# Altium PCB PCB_Project.PcbDoc
Units mil, origin at the board's own origin, x right, y up, seen from the top; angles counter-clockwise.
Board outline 1574.8 x 1574.8 mil, 2 copper layers (Top Layer, Bottom Layer); 30 components, 25 nets, 151 pads, 12 vias.
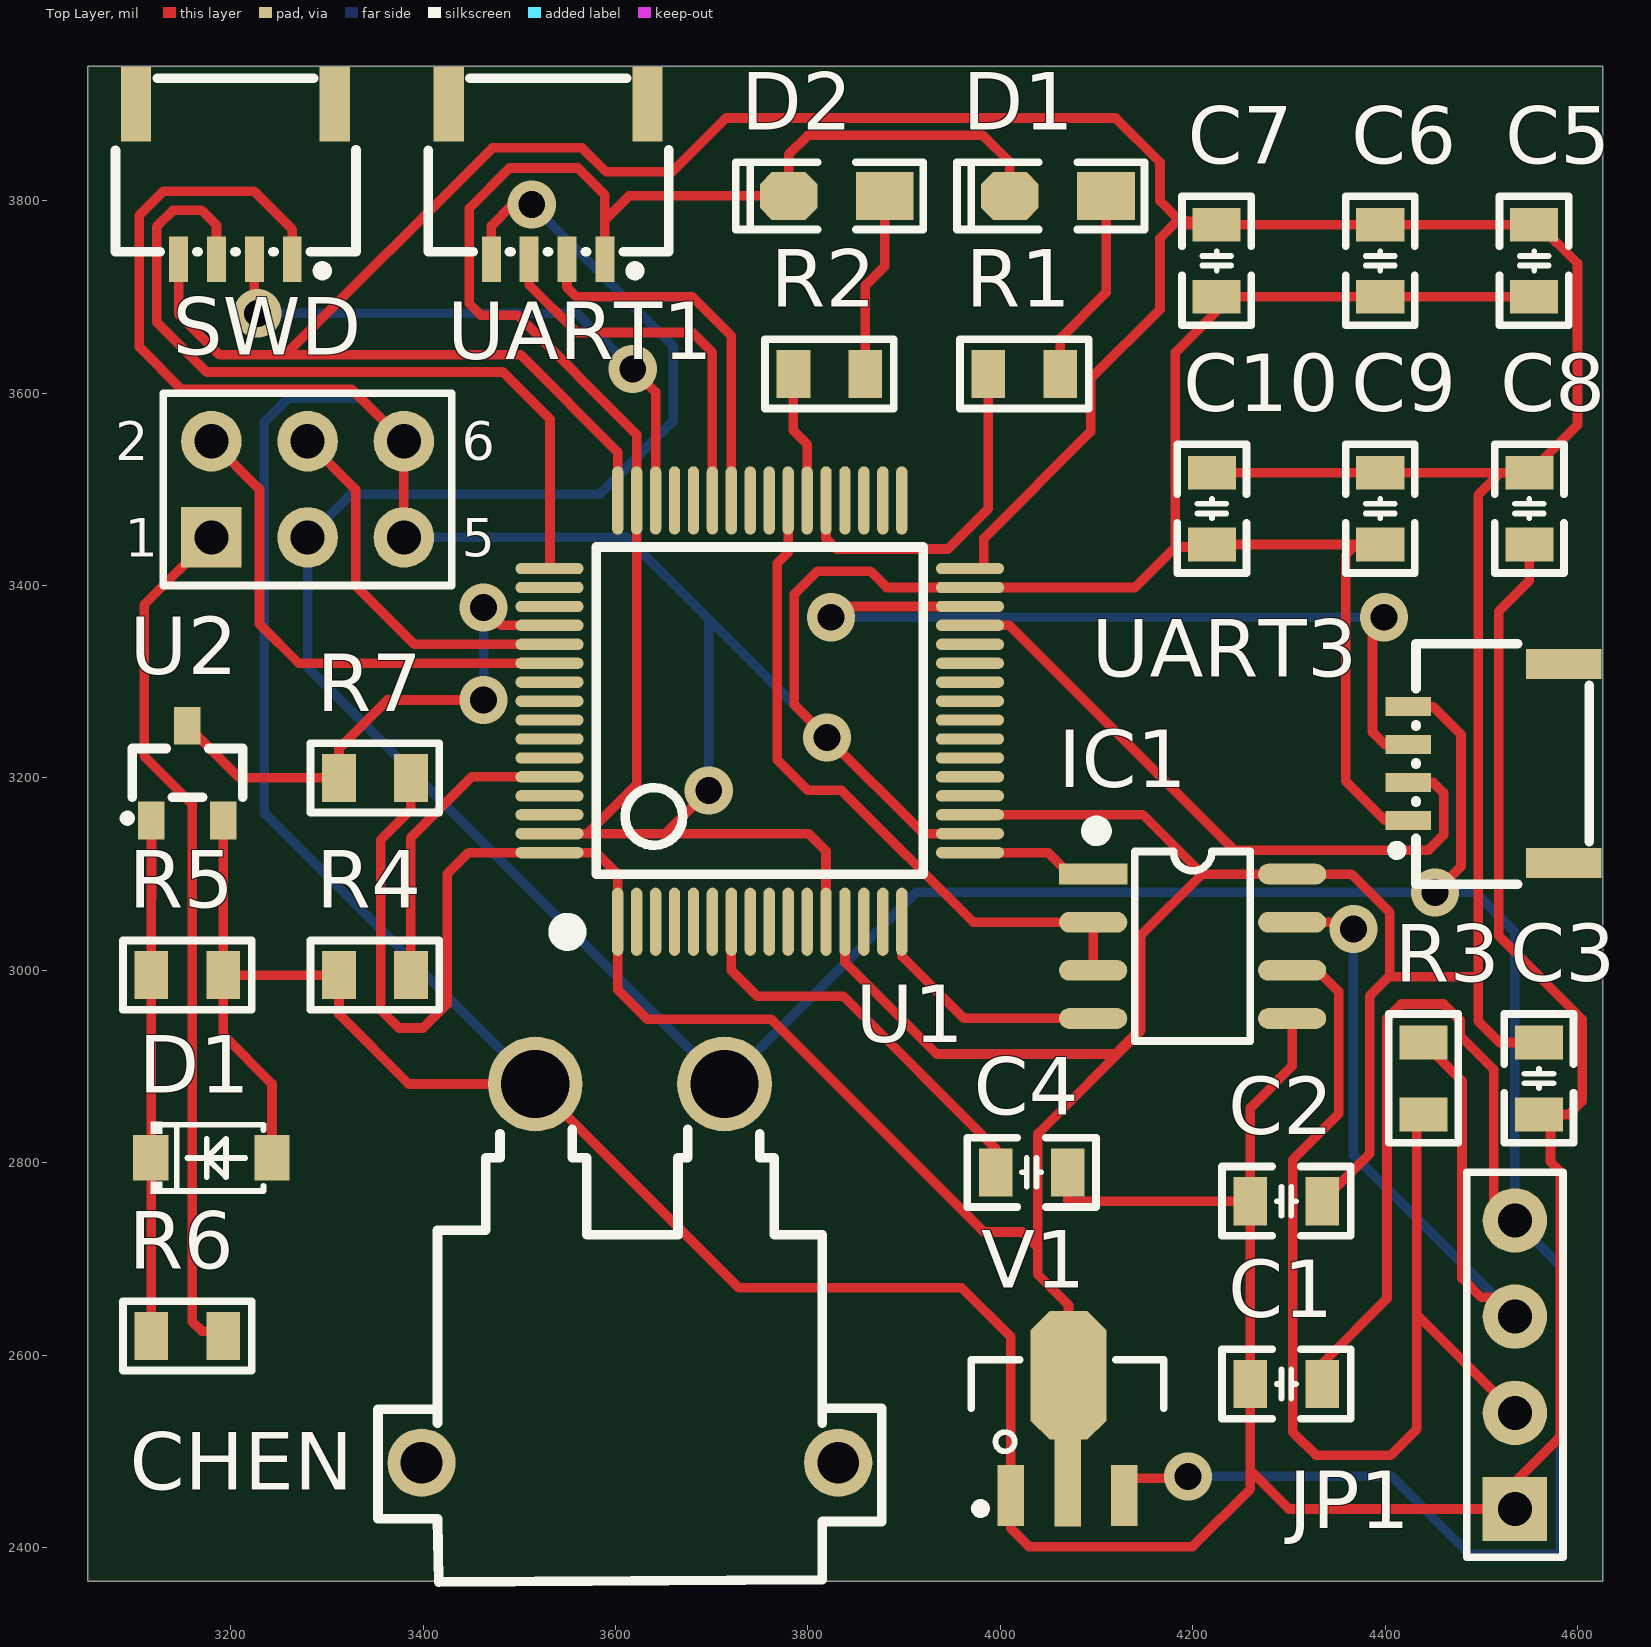
[diagram p0: Top Layer view]
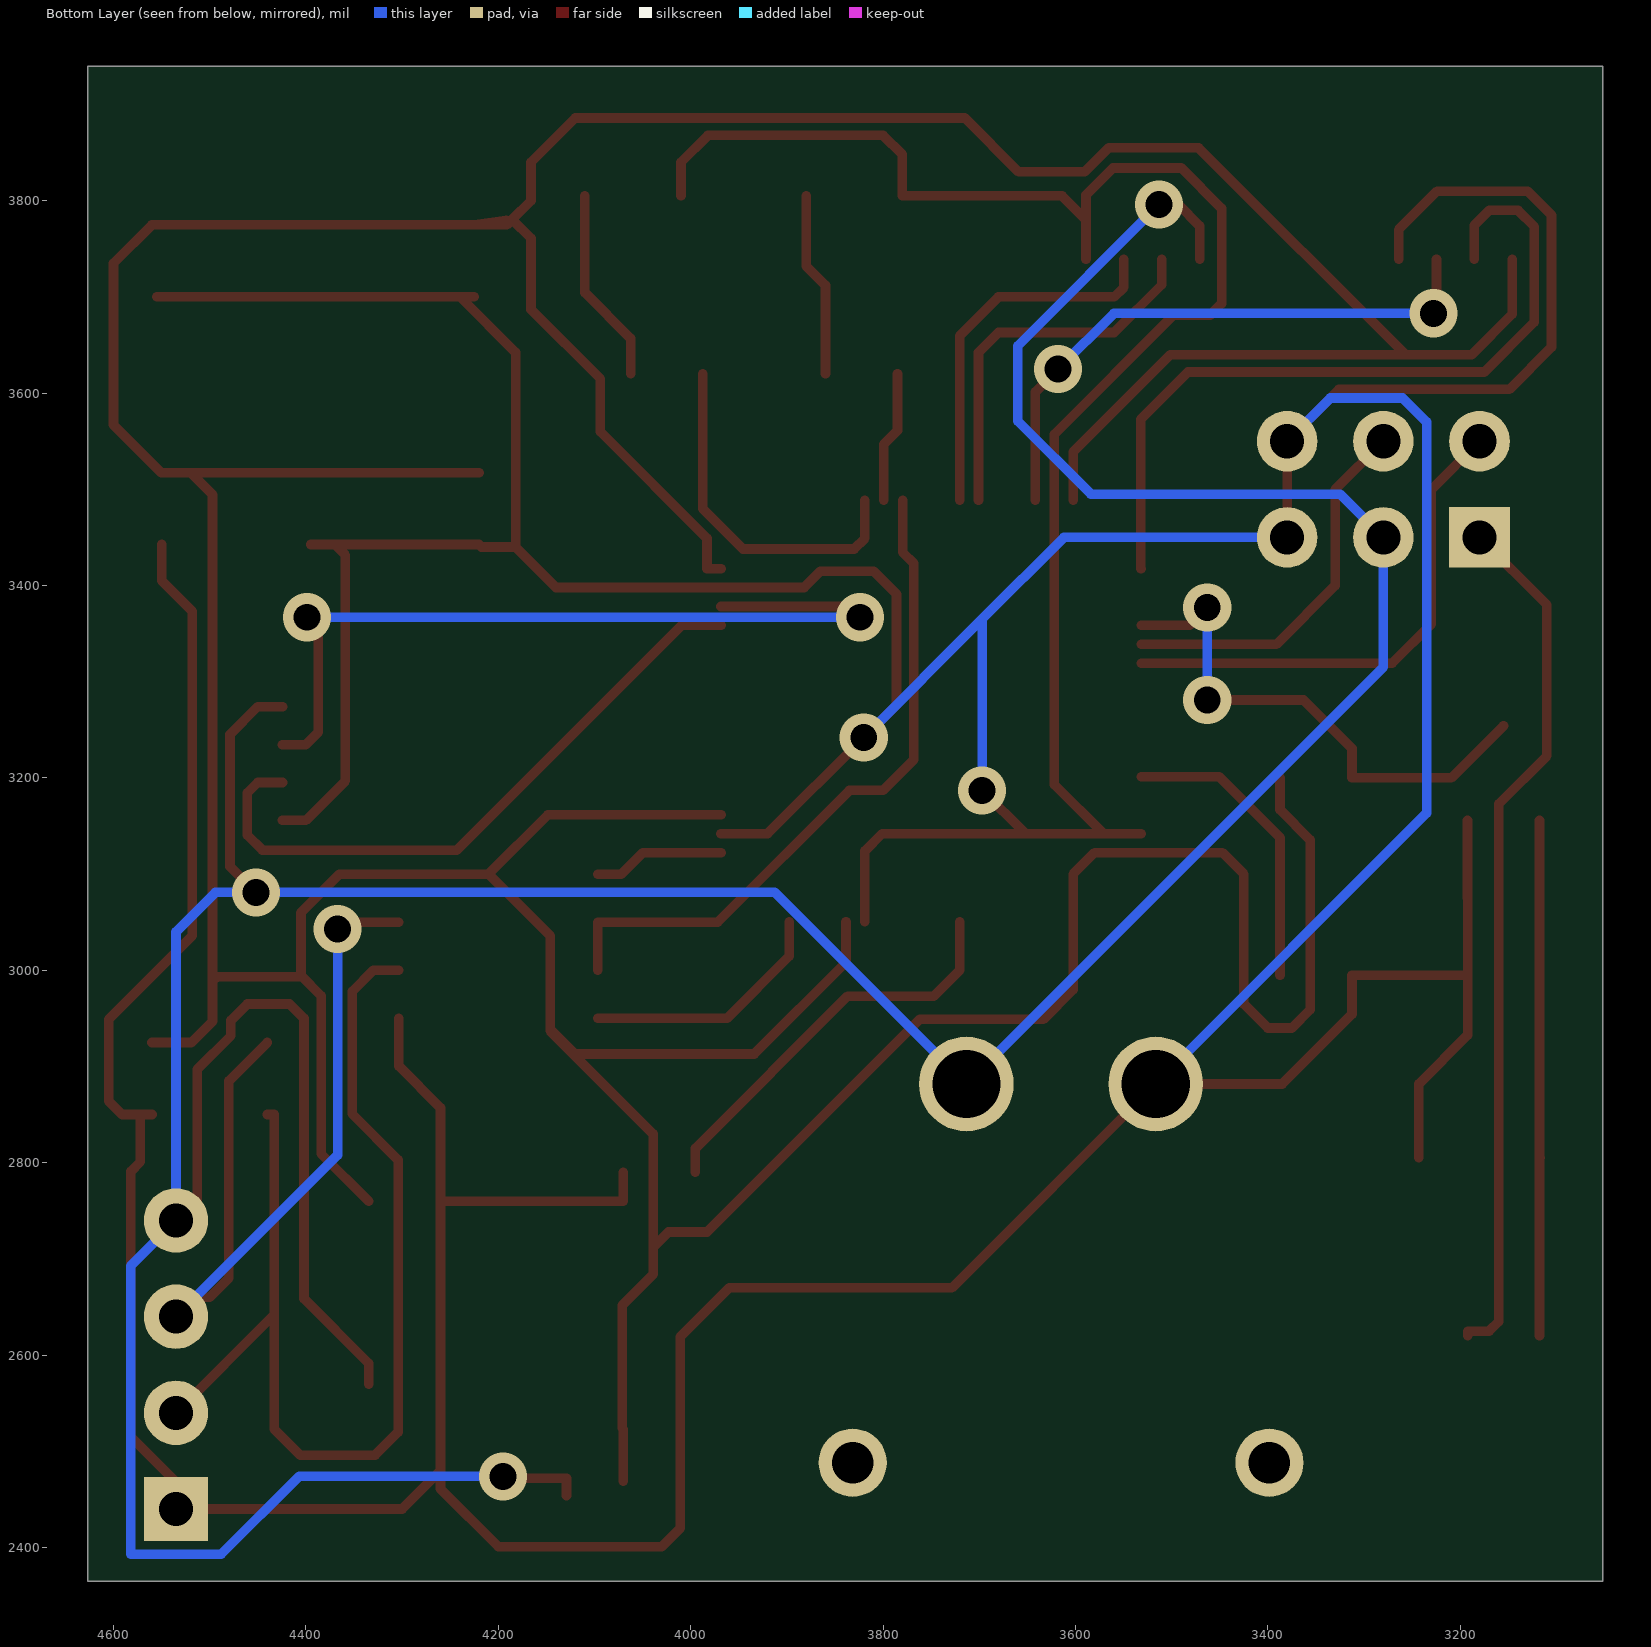
[diagram p1: Bottom Layer view, seen from below]

## Layer stack, top to bottom
Top Solder: solder mask 0.4, Solder Resist, Dk 3.5
Top Layer: signal copper 1.4
Dielectric 1: dielectric 12.6, FR-4, Dk 4.8
Bottom Layer: signal copper 1.4
Bottom Solder: solder mask 0.4, Solder Resist, Dk 3.5

## Board outline
3051.69,2365.2 3051.69,3940 4626.5,3940 4626.5,2365.2

## Design rules (kind name [scope] priority, off if disabled: settings)
Clearance [All] p1: gap=8 ignorepadtopadclearanceinfootprint=TRUE
PolygonConnect [All] p1: connectstyle=Relief reliefconductorwidth=10 reliefentries=4 polygonreliefangle="90 Angle" airgapwidth=10
RoutingVias [All] p1: holewidth=28 width=50 viastyle="Through Hole" minholewidth=28 minwidth=50 maxholewidth=28 maxwidth=50
SolderMaskExpansion [All] p1: expansion=4
Width [All] p1: maxlimit=10 minlimit=10 preferedwidth=10
30 further rules are at their usual default settings.

## Classes and differential pairs
component class PCB_Project: C1 C2 C3 C4 C5 C6 C7 C8 C9 C10 D1 D2 IC1 JP1 R1 R2 R3 R4 R5 R6 R7 SWD U1 U2 UART1 UART3 V1

## Components (designator, comment, footprint, x,y, rotation, side; value= is the part's Value field where it differs from the comment)
C1 "10uF" "C 0805_L" 4297.4,2570 r0 top
C2 "22uF" "C 0805_L" 4297.4,2760 r0 top
C3 "0.1uF" "C 0805_L" 4560,2887.6 r90 top
C4 "0.1uF" "C 0805_L" 4032.6,2790 r180 top
C5 "0.1uF" "C 0805_L" 4555,3737.6 r90 top
C6 "1uF" "C 0805_L" 4395,3737.6 r90 top
C7 "0.1uF" "C 0805_L" 4225,3737.6 r90 top
C8 "0.1uF" "C 0805_L" 4550,3480 r90 top
C9 "0.1uF" "C 0805_L" 4395,3480 r90 top
C10 "0.1uF" "C 0805_L" 4220,3480 r90 top
CHEN "" CONN-TH_XT30PW-M 3615,2685 r0 top (schematic designator XT30)
D1 "红色" "LED 0805G" 4060,3805 r180 top (schematic designator LED1)
D1 "SMF5.0A" SOD-123FL_L2.8-W1.8-LS3.8-RD 3180,2805 r0 top
D2 "红色" "LED 0805G" 3830,3805 r180 top (schematic designator LED2)
IC1 "SP3485" SOP8_N 4200,3025 r0 top
JP1 "HDR-1X4" HDR2.54-LI-4P 4535,2590 r90 top
JP2 "Header3X2" HDR2.54-LI-2x3P 3280,3500 r0 top
R1 "1K" "R 0805_L" 4025,3620 r0 top
R2 "1K" "R 0805_L" 3822.4,3620 r0 top
R3 "120R" "R 0805_L" 4440,2887.6 r90 top
R4 "1K" "R 0805_L" 3350,2995 r0 top
R5 "5.1k" "R 0805_L" 3155,2995 r180 top
R6 "33R" "R 0805_L" 3155,2620 r0 top
R7 "1k" "R 0805_L" 3350,3200 r0 top
SWD "" CONN-SMD_4P-P1.00_HDGC_HDGC1002WR-S-4P 3205,3820 r180 top
U1 "STM32F103RE" "LQFP64 10X10_N" 3750,3270 r0 top
U2 "BSS138" SOT-23-3_L2.9-W1.3-P1.90-LS2.6-BR 3155.09,3205 r270 top
UART1 "" CONN-SMD_4P-P1.00_HDGC_HDGC1002WR-S-4P 3530,3820 r180 top
UART3 "" CONN-SMD_4P-P1.00_HDGC_HDGC1002WR-S-4P 4505,3215 r90 top
V1 "AMS1117-3V3" SOT89_M 4070,2535 r0 top

## Footprints (in the part's own frame and the unit in brackets; to place one, negate y for a bottom-side part, rotate by r counter-clockwise, add the part's x,y. Pads: shape width x height; smd on the part's side, far side on the other; paste and mask are expansions set on the pad)
"C 0805_L" [mil] "无极性贴片电容"
  rect 35x50 smd: 1(-37.4,0) 2(37.4,0)
  silkscreen extent -67,-36 67,36, body extent -39,-24 39,24, height 20
CONN-SMD_4P-P1.00_HDGC_HDGC1002WR-S-4P [mm]
  rect 0.5x1.2 smd: 1(-1.5,2.05) 2(-0.5,2.05) 3(0.5,2.05) 4(1.5,2.05)
  rect 0.8x2 smd: 5(2.625,-2.05) 6(-2.625,-2.05)
  silkscreen extent -3.18,-2.72 3.17,2.48
CONN-TH_XT30PW-M [mm]
  round 2.5 hole 1.8: 1(-2.5,5) 2(2.5,5)
  round 1.8 hole 1.1: 3(5.5,-5) 4(-5.5,-5)
  silkscreen extent -6.65,-8.15 6.65,3.81
HDR2.54-LI-2x3P [mm] "双排排针，3x2脚"
  rect 1.6x1.6 hole 0.9: 1(-2.54,-1.27)
  round 1.6 hole 0.9: 2(-2.54,1.27) 3(0,-1.27) 4(0,1.27) 5(2.54,-1.27) 6(2.54,1.27)
  silkscreen extent -3.81,-2.54 3.81,2.54, body extent -3.81,-2.54 3.81,2.54, height 8.5
HDR2.54-LI-4P [mm] "排针，4脚"
  rect 1.7x1.7 hole 0.9: 1(-3.81,0)
  round 1.7 hole 0.9: 2(-1.27,0) 3(1.27,0) 4(3.81,0)
  silkscreen extent -5.08,-1.27 5.08,1.27, body extent -5.08,-1.27 5.08,1.27, height 8.5
"LED 0805G" [mil] "绿色0805LED"
  rect 60x50 smd: 1(-50,0)
  oct 60x50 smd: 2(50,0)
  silkscreen extent -90,-35 105,35, body extent -39,-25 39,25, height 32
"LQFP64 10X10_N" [mm] "64脚，体宽10x10mm，脚距0.5mm"
  oval 0.3x1.8 smd: 1(-3.75,-5.575) 2(-3.25,-5.575) 3(-2.75,-5.575) 4(-2.25,-5.575) 5(-1.75,-5.575) 6(-1.25,-5.575) 7(-0.75,-5.575) 8(-0.25,-5.575) 9(0.25,-5.575) 10(0.75,-5.575) 11(1.25,-5.575) 12(1.75,-5.575) 13(2.25,-5.575) 14(2.75,-5.575) 15(3.25,-5.575) 16(3.75,-5.575) 33(3.75,5.55) 34(3.25,5.55) 35(2.75,5.55) 36(2.25,5.55) 37(1.75,5.55) 38(1.25,5.55) 39(0.75,5.55) 40(0.25,5.55) 41(-0.25,5.55) 42(-0.75,5.55) 43(-1.25,5.55) 44(-1.75,5.55) 45(-2.25,5.55) 46(-2.75,5.55) 47(-3.25,5.55) 48(-3.75,5.55)
  oval 1.8x0.3 smd: 17(5.55,-3.75) 18(5.55,-3.25) 19(5.55,-2.75) 20(5.55,-2.25) 21(5.55,-1.75) 22(5.55,-1.25) 23(5.55,-0.75) 24(5.55,-0.25) 25(5.55,0.25) 26(5.55,0.75) 27(5.55,1.25) 28(5.55,1.75) 29(5.55,2.25) 30(5.55,2.75) 31(5.55,3.25) 32(5.55,3.75) 49(-5.55,3.75) 50(-5.55,3.25) 51(-5.55,2.75) 52(-5.55,2.25) 53(-5.55,1.75) 54(-5.55,1.25) 55(-5.55,0.75) 56(-5.55,0.25) 57(-5.55,-0.25) 58(-5.55,-0.75) 59(-5.55,-1.25) 60(-5.55,-1.75) 61(-5.55,-2.25) 62(-5.55,-2.75) 63(-5.55,-3.25) 64(-5.55,-3.75)
  silkscreen extent -5.33,-6.09 4.32,4.32, body extent -6,-6 6,6, height 1.45
"R 0805_L" [mil] "1/8W贴片电阻"
  rect 35x50 smd: 1(-37.4,0) 2(37.4,0)
  silkscreen extent -67,-36 67,36, body extent -39,-25 39,25, height 20
SOD-123FL_L2.8-W1.8-LS3.8-RD [mm]
  rect 0.93x1.2 smd: 1(-1.6,0) 2(1.6,0)
  silkscreen extent -1.6,-0.95 1.38,0.95
SOP8_N [mm] "5*6*1.8mm（长宽高）"
  rect 1.8x0.55 smd: 1(-2.625,1.905)
  oval 1.8x0.55 smd: 2(-2.625,0.635) 3(-2.625,-0.635) 4(-2.625,-1.905) 5(2.625,-1.905) 6(2.625,-0.635) 7(2.625,0.635) 8(2.625,1.905)
  silkscreen extent -2.69,-2.5 1.52,3.2, body extent -3,-2.5 3,2.5, height 1.9
SOT89_M [mm] "4.6x4.3x1.6mm(长宽高)"
  rect 0.7x1.6 smd: 1(-1.5,-2.054) 3(1.5,-2.054)
  rect 0.7x2.4 smd: 2(0,-1.676)
  oct 2x3.4 smd: 2(0.025,1.118)
  silkscreen extent -2.54,-2.52 2.54,1.52, body extent -2.3,-2.4 2.3,1.9, height 1.6
SOT-23-3_L2.9-W1.3-P1.90-LS2.6-BR [mm]
  rect 1x0.7 smd: 1(1.25,-0.95) 2(1.25,0.95) 3(-1.25,0)
  silkscreen extent -0.65,-1.69 1.29,1.46

## Part data
C1 C2 C3 C4 C5 C6 C7 C8 C9 C10: library part C, "无极性贴片电容"
CHEN: library part XT30PW-M, BOM_JLCPCB Part Class="Extended Part", BOM_Manufacturer="Changzhou Amass Elec", BOM_Manufacturer Part=XT30PW-M, BOM_Supplier=LCSC, BOM_Supplier Part=C431092, Contributor=LCSC, spicePre=C, spiceSymbolName=XT30PW-M
D1 D2: library part LED-SMD, "贴片LED", BOM名称=贴片LED, 学习资源=www.ooocke.com, 版权归属=源创客
D1: library part SMF5.0A_C2836403, BOM_JLCPCB Part Class="Extended Part", BOM_Manufacturer=MSKSEMI(美森科), BOM_Manufacturer Part=SMF5.0A, BOM_Supplier=LCSC, BOM_Supplier Part=C2836403, Contributor=LCSC, spicePre=D, spiceSymbolName=SMF5.0A_C2836403
IC1: "RS485总线收发芯片", BOM名称=RS485总线收发芯片, 学习资源=www.ooocke.com, 版权归属=源创客
JP1: library part "Header 4", "4P接插件", BOM名称=4P接插件, 学习资源=www.ooocke.com, 版权归属=源创客
JP2: library part "Header 3X2", "3*2P接插件"
R1 R2 R3 R4 R5 R6 R7: library part R, "贴片电阻"
SWD UART1 UART3: library part HDGC1002WR-S-4P, BOM_JLCPCB Part Class="Extended Part", BOM_Manufacturer=HDGC(华德共创), BOM_Manufacturer Part=HDGC1002WR-S-4P, BOM_Supplier=LCSC, BOM_Supplier Part=C2936214, Contributor=LCSC, spicePre=C, spiceSymbolName=HDGC1002WR-S-4P
U1: "32位STM单片机", BOM名称=32位STM单片机, 学习资源=www.ooocke.com, 版权归属=源创客
U2: library part BSS138_C3015220, BOM_Manufacturer=KUU, BOM_Manufacturer Part=BSS138, BOM_Supplier=LCSC, BOM_Supplier Part=C3015220, Contributor=lcsc, link=https://atta.szlcsc.com/upload/public/pdf/source/20220516/125DEF07DB3AB32C02C9AD402DEFFF8E.pdf, spicePre=U, spiceSymbolName=BSS138_C3015220
V1: library part AMS1117, "三端稳压芯片", BOM名称=稳压芯片, 学习资源=www.ooocke.com, 版权归属=源创客

## Via types
v1: diameter 50, hole 28, Top Layer to Bottom Layer, 12 vias

## Nets (pads, with @x,y where several pads share a name; then routed paths per layer and width w, separated by ;. In a path a pad name is that pad's centre, name@x,y a point inside that pad or via, vN(x,y) a via of type N, cw(c..) or ccw(c..) an arc to the next point about the centre after c; other vN are vias at no path point)
485A: IC1.6 JP1.2 R3.1 | length 1164
  Top Layer w10: IC1.6 4330,3000 4351.78,2978.22 4351.78,2850.78 4304,2803 4304,2520 4328,2496 4406,2496 4433,2523 4433,2642 ; R3.1 4433,2850.2 4433,2642 ; JP1.2 4433,2642
485B: IC1.7 JP1.3 R3.2 | length 884
  Top Layer w10: IC1.7 4360,3050 v1(4367,3043) ; R3.2 4480,2885 4480,2680 4500,2660 4535,2660 JP1.3
  Bottom Layer w10: v1(4367,3043) 4367,2808 JP1.3
485RE: IC1.2 IC1.3 U1.39 | length 722.9
  Top Layer w10: U1.39 3779.53,3434.53 3768,3423 3768,3219 3800,3187 3835,3187 3972,3050 IC1.2 IC1.3
+5: C1.2 CHEN.2 JP1.4 JP2.3 UART1.4 UART3.4 V1.3 | length 4625.7
  Top Layer w10: UART1.4 3470.95,3773.95 3493,3796 v1(3513,3796) ; V1.3 4129.06,2472 4193,2472 v1(4195,2474) ; C1.2 4334.8,2591.56 4402,2658.76 4402,2950 4417,2965 4460.88,2965 4478,2947.88 4478,2932 4513,2897 4513,2740 JP1.4 ; UART3.4 4450,3274.05 4478.92,3245.13 4478.92,3107.92 v1(4452,3081)
  Bottom Layer w10: v1(3513,3796) 3660,3649 3660,3571 3584,3495 3325,3495 JP2.3 3280,3315.27 CHEN.2 3912.57,3081 v1(4452,3081) 4494,3081 4535,3040 JP1.4 4582,2693 4582,2393 4488,2393 4407,2474 v1(4195,2474)
GND: C1.1 C2.1 C3.1 C4.1 C5.1 C6.1 C7.1 C8.1 C9.1 C10.1 CHEN.1 D1.2 D2.2 IC1.5 JP1.1 JP2.5 JP2.6 R4.1 R5.1 SWD.1 U1.12 U1.18 U1.31 U1.47 U1.63 U2.2 UART1.1 UART3.1 V1.1 | length 10341.2
  Top Layer w10: U2.2 3192.49,3075.08 3192.4,3075 R5.1 ; D1.2@3242.99,2805 3242.99,2882.01 3192.4,2932.6 R5.1 ; SWD.1 3264.06,3770 3224.06,3810 3130,3810 3105.11,3785.11 3105.11,3647.89 3149,3604 3326,3604 JP2.6 JP2.5 ; U1.63 3571,3142.05 ; UART1.1 3589.06,3780 ; v1(3697,3187) 3652.05,3142.05 ; U1.12 3818.9,3124 3800.85,3142.05 3652.05,3142.05 ; U1.18 3920,3142.05 v1(3820.05,3242) 3786,3276.05 3786,3391 3810,3415 3865,3415 3882.05,3397.95 U1.31 4139.95,3397.95 4182,3440 ; D1.2@4010,3805 4010,3840 3982,3868 3800,3868 3780,3848 D2.2 3614.06,3805 3589.06,3780 ; C4.1 4070,2760 C2.1 ; C7.1 C7.1@4240,3700.2 ; IC1.5 4303.35,2900.35 4260,2857 C2.1 ; C9.1 4370,3442.6 ; UART3.1 4400,3155.94 4359,3196.94 4359,3431.6 4370,3442.6 ; C8.1 4550,3405 4518,3373 4518,3036 4605,2949 4605,2864.2 4591,2850.2 C3.1@4572,2850.2 ; C5.1 C6.1 C7.1@4240,3700.2 ; C3.1 C3.1@4572,2850.2 ; R5.1 3252,2995 R4.1 3312.6,2954.4 3385.15,2881.85 CHEN.1 3728.42,2670 3960,2670 4010.94,2619.06 V1.1 4010.94,2420 4029.94,2401 4200,2401 4260,2461 4260,2480 ; 3571,3142.05 3652.05,3142.05 ; 3571,3142.05 3622.05,3193.1 U1.47 3622.05,3556.95 3498,3681 3460,3681 3448,3693 3448,3792 3490,3834 3561,3834 3589.06,3805.94 3589.06,3780 ; 4182,3440 4217.41,3440 C10.1 4370,3442.6 ; 4182,3440 4182,3642.2 C7.1@4240,3700.2 ; 4260,2480 C1.1 C2.1 ; 4260,2480 4300,2440 JP1.1 4535,2468 4582,2515 4582,2791 4572,2801 C3.1@4572,2850.2
  Bottom Layer w10: JP2.5 3612.05,3450 3697,3365.05 ; JP2.6 3335,3595 3260,3595 3235,3570 3235,3163.42 CHEN.1 ; v1(3697,3187) 3697,3365.05 ; v1(3820.05,3242) 3697,3365.05
NetC4_2: C4.2 U1.7 | length 426.7
  Top Layer w10: U1.7 3720.47,3000 3747.28,2973.2 3836.8,2973.2 3995.2,2814.8 C4.2
NetD1_1: D1.1@3117.01,2805 R5.2 R6.1 U2.1 | length 536.3
  Top Layer w10: R6.1 3117.6,2804.41 3117.01,2805 3117.6,2805.6 R5.2 3117.6,3075 3117.69,3075.08 U2.1
NetLED1_1: D1.1@4110,3805 R1.2 | length 204.7
  Top Layer w10: R1.2 4062.4,3657 4110,3704.6 D1.1@4110,3805
NetLED2_1: D2.1 R2.2 | length 193.4
  Top Layer w10: R2.2 3859.8,3712 3880,3732.2 D2.1
NetR1_1: R1.1 U1.37 | length 370.1
  Top Layer w10: U1.37 3818.9,3449.1 3830,3438 3945.6,3438 3987.6,3480 R1.1
NetR2_1: R2.1 U1.38 | length 137.4
  Top Layer w10: R2.1 3785,3561.21 3799.21,3547 U1.38
NetR4_2: R4.2 U1.60 | length 313.2
  Top Layer w10: R4.2 3387.4,3138 3450.5,3201.1 U1.60
RX1: U1.43 UART1.3 | length 400
  Top Layer w10: UART1.3 3510.32,3712.68 3560,3663 3680,3663 3700.79,3642.21 U1.43
RX2: IC1.1 U1.17 | length 137.4
  Top Layer w10: U1.17 4049.64,3122.36 4072,3100 IC1.1
RX3: U1.30 UART3.3 | length 891.1
  Top Layer w10: v1(3824,3367) 3835.27,3378.27 U1.30 ; v1(4399,3367) 4387,3355 4387,3247.68 4400,3234.68 UART3.3
  Bottom Layer w10: v1(3824,3367) v1(4399,3367)
RX4: R7.1 U1.52 U2.3 | length 554
  Top Layer w10: U2.3 3209.29,3200 R7.1 3312.6,3230.6 3363,3281 v1(3463,3281) ; v1(3463,3377) 3481.42,3358.58 U1.52
  Bottom Layer w10: v1(3463,3281) v1(3463,3377)
RX5: JP2.2 U1.54 | length 529.1
  Top Layer w10: JP2.2 3230,3500 3230,3360 3270.79,3319.21 U1.54
SBUS: JP2.1 R6.2 | length 906.2
  Top Layer w10: JP2.1 3110,3380 3110,3223 3160,3173 3160,2635 3170,2625 3192.4,2625 R6.2
SWC: SWD.3 U1.49 | length 816.7
  Top Layer w10: SWD.3 3185.32,3774.68 3170,3790 3140,3790 3123.11,3773.11 3123.11,3673.89 3175,3622 3483,3622 3532,3573 3532,3417.64 U1.49
SWD: SWD.2 U1.46 | length 618
  Top Layer w10: SWD.2 3224.69,3686.31 v1(3228,3683) ; v1(3618,3625) 3641.73,3601.27 U1.46
  Bottom Layer w10: v1(3228,3683) 3560,3683 v1(3618,3625)
TX1: U1.42 UART1.2 | length 392
  Top Layer w10: UART1.2 3549.69,3710 3559.69,3700 3680,3700 3720.47,3659.53 U1.42
TX2: IC1.4 U1.16 | length 261.7
  Top Layer w10: U1.16 3897.64,3014.63 3962.27,2950 IC1.4
TX3: U1.29 UART3.2 | length 680.5
  Top Layer w10: U1.29 4009.42,3358.58 4243,3125 4445.2,3125 4460.92,3140.71 4460.92,3184.39 4450,3195.31 UART3.2
TX5: JP2.4 U1.53 | length 397.5
  Top Layer w10: JP2.4 3330,3500 3330,3400 3391.1,3338.9 U1.53
VCC_3.3: C2.2 C3.2 C5.2 C6.2 C7.2 C8.2 C9.2 C10.2 IC1.8 R7.2 SWD.4 U1.1 U1.13 U1.19 U1.32 U1.48 U1.64 V1.2 | length 7247.1
  Top Layer w10: SWD.4 3145.95,3682.05 3188,3640 3257,3640 ; R7.2 3387.4,3167 3356,3135.6 3356,2959 3375,2940 3400,2940 3425,2965 3425,3100 3447.36,3122.36 U1.64 3580,3122.36 3602.36,3100 U1.1 3602.36,2980 3633.36,2949 3762,2949 3983,2728 4023,2728 4039,2712 ; U1.48 3602.36,3539 3501.36,3640 3257,3640 ; U1.13 3838.58,3008.42 3934,2913 4120,2913 4146,2939 ; U1.19 4148.27,3161.73 4210,3100 ; U1.32 3983,3417.64 3983,3449 4094,3560 4094,3615 4166,3687 4166,3761 4185.5,3780.5 ; V1.2@4070,2469 4070,2523 4071,2524 4071,2579 4071,2652 4039,2684 4039,2712 ; 4191.65,3779.64 C7.2 ; C10.2 C9.2 4520,3517.4 ; C2.2 4384,2809.2 4384,2973.5 4405,2994.5 ; 4497,2990 4497,3494.4 4520,3517.4 ; C3.2 4519,2925 4497,2947 4497,2988.68 4492.5,2993.18 4405,2993.18 4405,2994.5 ; 3257,3640 3472,3855 3565.46,3855 3590.46,3830 3659,3830 3715,3886 4120,3886 4166,3840 4166,3800 4185.5,3780.5 ; 4039,2712 4039,2830 4146,2937 4146,2939 ; 4146,2939 4146,3036 4210,3100 ; 4185.5,3780.5 4191,3775 C7.2 ; 4210,3100 IC1.8 4365,3100 4405,3060 4405,2994.5 ; C7.2 C6.2 C5.2 4560,3775 4600,3735 4600,3567 4550.4,3517.4 C8.2 4520,3517.4
pads on no net: CHEN.3 CHEN.4 SWD.5 SWD.6 U1.2 U1.3 U1.4 U1.5 U1.6 U1.8 U1.9 U1.10 U1.11 U1.14 U1.15 U1.20 U1.21 U1.22 U1.23 U1.24 U1.25 U1.26 U1.27 U1.28 U1.33 U1.34 U1.35 U1.36 U1.40 U1.41 U1.44 U1.45 U1.50 U1.51 U1.55 U1.56 U1.57 U1.58 U1.59 U1.61 U1.62 UART1.5 UART1.6 UART3.5 UART3.6

## Silkscreen, mask and mechanical layers (free items; w line width, h text height)
Mechanical 13:
  the board outline again, w10

## Text inside footprints (layer, text, board x,y; h text height)
JP2: Top Overlay "6" at 3440,3530 h40; Top Overlay "5" at 3440,3430 h40; Top Overlay "2" at 3080,3530 h40; Top Overlay "1" at 3090,3430 h40